# EAGLE board sensor-LCD-shield (EAGLE 5.06)
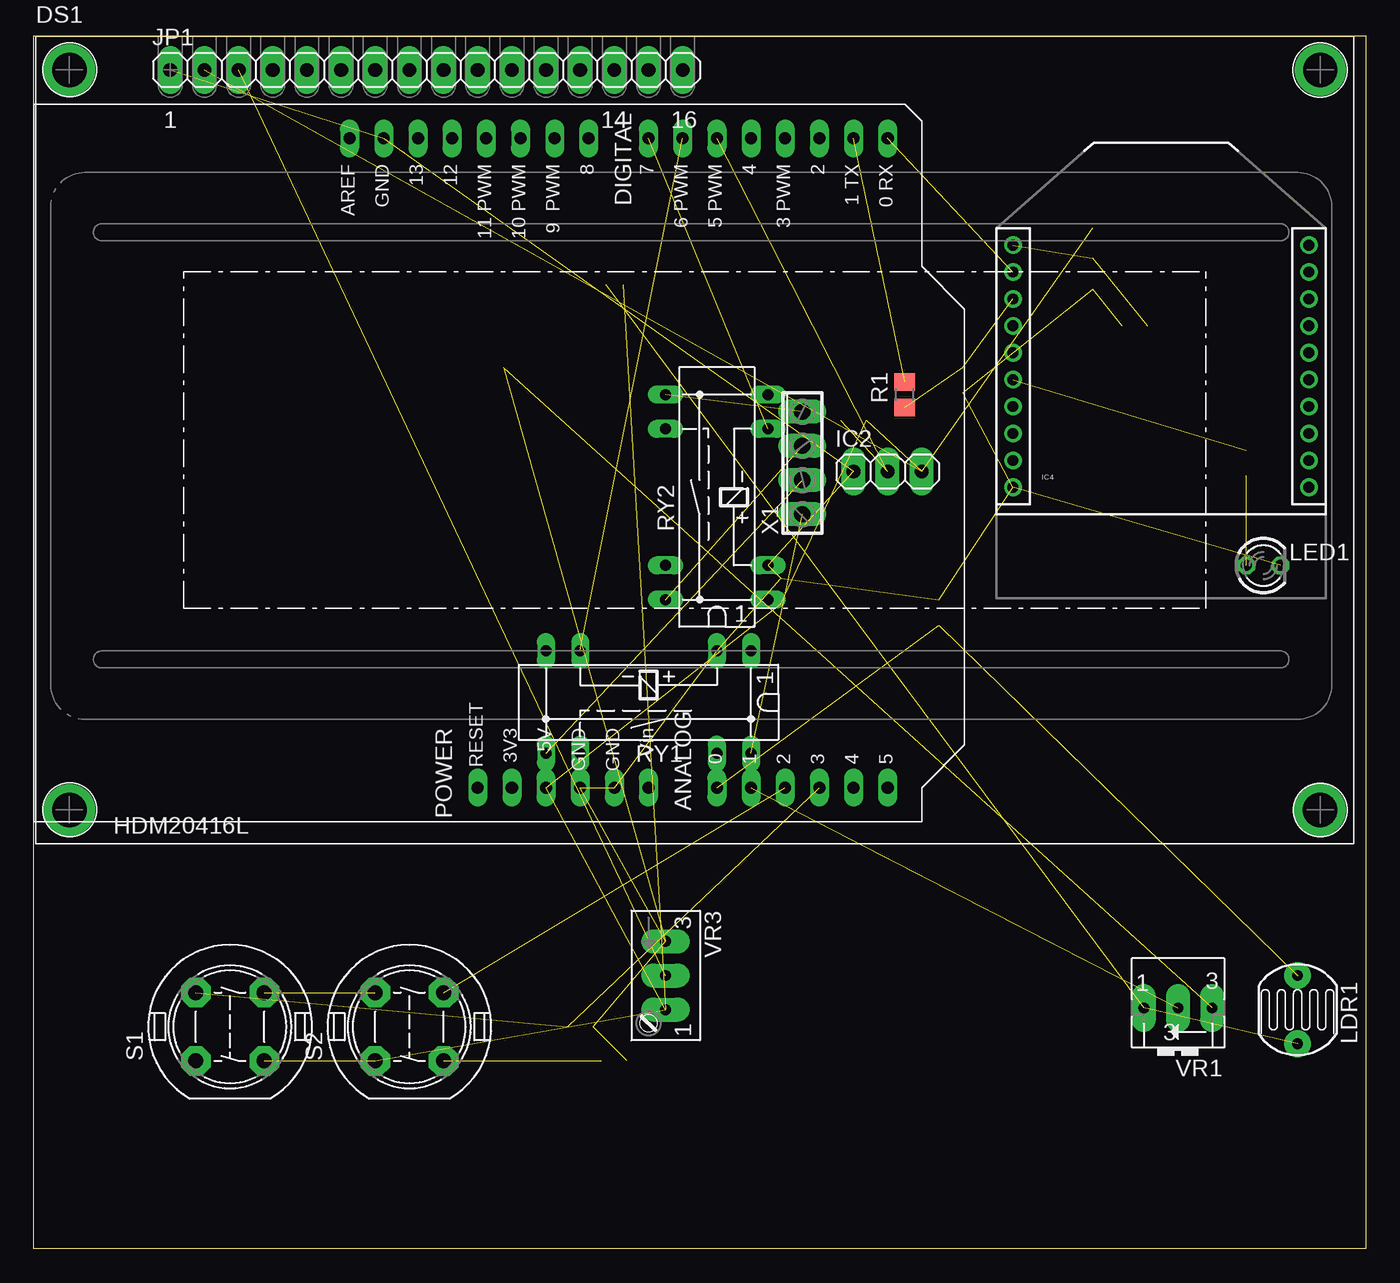
[diagram p0: board, top side]
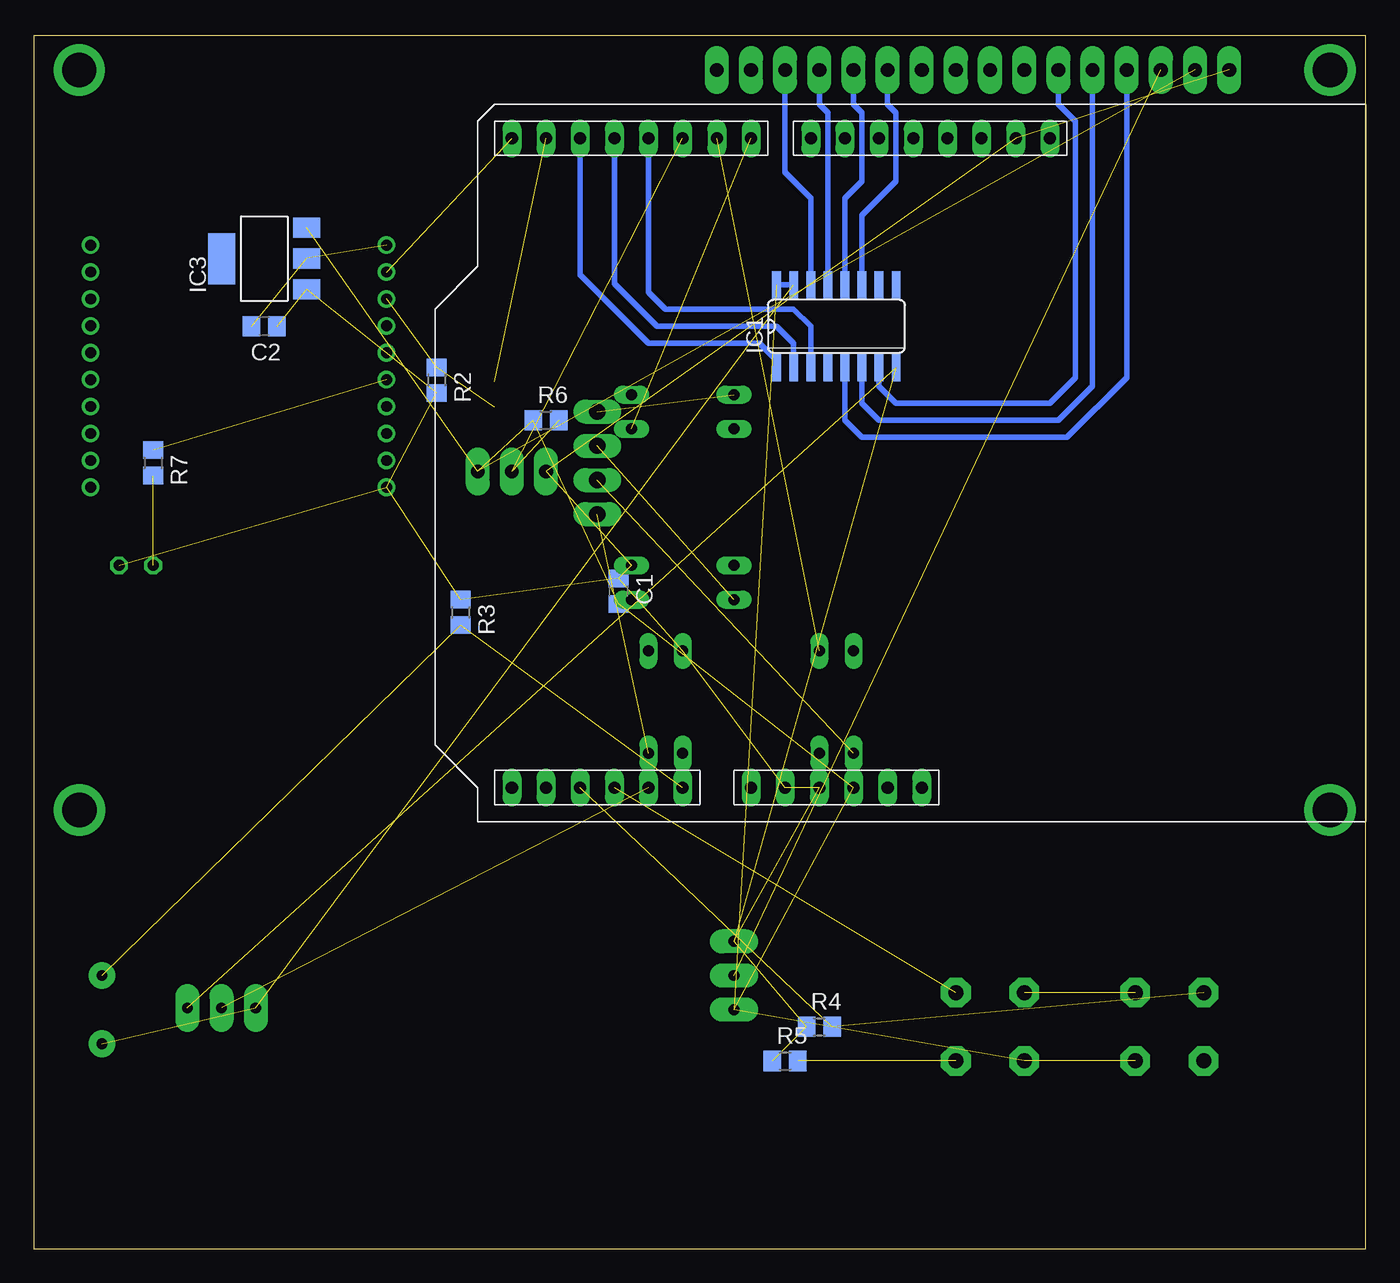
[diagram p1: board, bottom side, seen from below]

Size 99.06 x 90.17 mm. Coordinates in mm from the lower left corner, seen from the top.
Outline: 0,90.17 99.06,90.17 99.06,0 0,0 0,90.17
Copper layers (1*16): Top 0.035mm / dielectric 1.5mm / Bottom 0.035mm
Design rules "default": minimum track width 10mil, minimum drill 24mil, track to track 8mil, track to pad 8mil, pad to pad 8mil, via to via 8mil, smd to smd 8mil, copper to edge 40mil, drill to drill 8mil, minimum pad ring 10mil, minimum via ring 8mil, stop-mask expansion 4mil, vias tented up to drill 0mil, thermal gap 10mil

## Footprints (pad centres in the part's own frame; a part is rotated, then mirrored left to right if it is on the bottom)
C0805 = smd 1.3 x 1.5: 1 -0.95,0; 2 0.95,0
HDM20416L = drill 1.016 pad 1.778 long: 1 -38.105,27.947; 2 -35.565,27.947; 3 -33.025,27.947; 4 -30.485,27.947; 5 -27.945,27.947; 6 -25.405,27.947; 7 -22.865,27.947; 8 -20.325,27.947; 9 -17.785,27.947; 10 -15.245,27.947; 11 -12.705,27.947; 12 -10.165,27.947; 13 -7.625,27.947; 14 -5.085,27.947; 15 -2.545,27.947; 16 -0.005,27.947 | drill 2.54 pad 3.81 round: P$1 47.409,27.94; P$2 47.396,-27.064; P$3 -45.593,-27.064; P$4 -45.593,27.94
SO16 = smd 0.66 x 2.032: 1 -4.445,-3.073; 2 -3.175,-3.073; 3 -1.905,-3.073; 4 -0.635,-3.073; 5 0.635,-3.073; 6 1.905,-3.073; 7 3.175,-3.073; 8 4.445,-3.073; 9 4.445,3.073; 10 3.175,3.073; 11 1.905,3.073; 12 0.635,3.073; 13 -0.635,3.073; 14 -1.905,3.073; 15 -3.175,3.073; 16 -4.445,3.073
1X03 = drill 1.016 pad 1.8 long: 1 -2.54,0; 2 0,0; 3 2.54,0
SOT223 = smd 1.499 x 2.007: 1 -2.261,-3.15; 2 0.025,-3.15; 3 2.311,-3.15 | smd 3.81 x 2.007: 4 0,3.15
XBEE-SILK = drill 0.8 round: 1 -11,20; 2 -11,18; 3 -11,16; 4 -11,14; 5 -11,12; 6 -11,10; 7 -11,8; 8 -11,6; 9 -11,4; 10 -11,2; 11 11,2; 12 11,4; 13 11,6; 14 11,8; 15 11,10; 16 11,12; 17 11,14; 18 11,16; 19 11,18; 20 11,20
1X16 = drill 1.016 pad 1.8 long: 1 -19.05,0; 2 -16.51,0; 3 -13.97,0; 4 -11.43,0; 5 -8.89,0; 6 -6.35,0; 7 -3.81,0; 8 -1.27,0; 9 1.27,0; 10 3.81,0; 11 6.35,0; 12 8.89,0; 13 11.43,0; 14 13.97,0; 15 16.51,0; 16 19.05,0
VT800 = drill 0.8 pad 2 round: 1 -2.54,0; 2 2.54,0
LED3MM = drill 0.813 octagon: A -1.27,0; K 1.27,0
R0805 = smd 1.3 x 1.5: 1 -0.95,0; 2 0.95,0
RR1A = drill 0.813 long: 1 -7.62,-3.81; 2 -5.08,-3.81; 6 5.08,-3.81; 7 7.62,-3.81; 8 7.62,3.81; 9 5.08,3.81; 13 -5.08,3.81; 14 -7.62,3.81
DT6 = drill 1.118 pad 2.2 octagon: 1 -2.54,2.54; 2 2.54,2.54; 3 2.54,-2.54; 4 -2.54,-2.54
SHIELD = drill 0.9 pad 1.27 long: 0_RX -25.4,27.94; 1_TX -25.4,25.4; 2 -25.4,22.86; 3 -25.4,20.32; 3V3 22.86,0; 4 -25.4,17.78; 5 -25.4,15.24; 5V 22.86,2.54; 6 -25.4,12.7; 7 -25.4,10.16; 8 -25.4,5.715; 9 -25.4,3.175; 10 -25.4,0.635; 11 -25.4,-1.905; 12 -25.4,-4.445; 13 -25.4,-6.985; A_0 22.86,15.24; A_1 22.86,17.78; A_2 22.86,20.32; A_3 22.86,22.86; A_4 22.86,25.4; A_5 22.86,27.94; AREF -25.4,-12.065; GND0 -25.4,-9.525; GND1 22.86,7.62; GND2 22.86,5.08; RESET 22.86,-2.54; VIN 22.86,10.16
B25V = drill 0.8 pad 1.8 long: A 2.54,0.635; E -2.54,0.635; S 0,0.635
S64W = drill 0.8 pad 1.8 long: A 2.54,1.27; E -2.54,1.27; S 0,1.27
4POL254 = drill 1.2 long: 1 -3.81,0; 2 -1.27,0; 3 1.27,0; 4 3.81,0

## Placement (x,y rotation side)
C1  100 nF  [C0805]  55.56,48.89 270 bottom
C2  100 nF  [C0805]  81.92,68.58 180 bottom
DS1  HDM20416L  [HDM20416L]  48.26,59.69 0 top
IC1  4094D  [SO16]  39.37,68.58 0 bottom
IC2  [1X03]  63.5,57.78 0 top
IC3  REG1117  [SOT223]  81.92,73.6 90 bottom
IC4  XBEE-1B2  [XBEE-SILK]  83.82,54.61 0 top
JP1  [1X16]  29.21,87.63 0 top
LDR1  VT80N1  [VT800]  93.98,17.78 90 top
LED1  [LED3MM]  91.44,50.8 0 top
R1  100 k  [R0805]  64.77,63.5 90 top
R2  100 k  [R0805]  69.09,64.58 270 bottom
R3  100 k  [R0805]  67.31,47.31 270 bottom
R4  100 k  [R0805]  40.64,16.51 0 bottom
R5  100 k  [R0805]  43.18,13.97 0 bottom
R6  4k7  [R0805]  60.96,61.59 0 bottom
R7  69 R  [R0805]  90.17,58.42 270 bottom
RY1  RR1A  [RR1A]  45.72,40.64 180 top
RY2  RR1A  [RR1A]  50.8,55.88 90 top
S1  DT6  [DT6]  14.61,16.51 90 top
S2  DT6  [DT6]  27.94,16.51 90 top
U$1  ARDUINO-USBLONG_PADS_TEXT  [SHIELD]  35.56,57.15 270 top
VR1  [B25V]  85.09,18.54 180 top
VR3  100 k  [S64W]  45.72,20.32 270 top
X1  [4POL254]  57.15,58.42 90 top

## Library data of the parts
C1 C2 R1-R7 = rcl
DS1 = abi-lcd
IC1 = 40xx
IC2 JP1 = pinhead
IC3 = burr-brown
IC4 = SparkFun
LDR1 = photo-elements
LED1 = led
RY1 RY2 = relay
S1 S2 = switch-misc
U$1 = Arduino-Various
VR1 VR3 = pot
X1 = con-phoenix-254

## Nets
3V3: U$1.3V3
+3V3: C2.2 IC3.2 IC4.1
+5V: C1.2 IC1.15 IC1.16 IC2.3 IC3.3 JP1.2 LDR1.1 R6.1 S1.4 S2.1 U$1.5V VR1.A VR3.A
GND: C1.1 C2.1 IC1.8 IC2.1 IC3.1 IC4.10 JP1.1 LED1.K R2.2 R3.1 R4.1 R5.1 RY1.2 RY2.2 U$1.GND0 U$1.GND1 U$1.GND2 VR1.E VR3.E
N$1: IC1.1 U$1.2
N$2: IC1.3 U$1.4
N$3: IC1.2 U$1.3
N$4: RY1.6 U$1.6
N$5: RY2.6 U$1.7
N$6: RY1.14 X1.1
N$7: RY1.8 X1.2
N$9: RY2.8 X1.4
N$10: R4.2 S1.2 U$1.A_3
N$11: U$1.A_1 VR1.S
N$12: S2.3 U$1.A_2
N$13: LDR1.2 R3.2 U$1.A_0
N$14: IC1.11 JP1.11
N$15: IC1.12 JP1.12
N$16: IC1.13 JP1.13
N$17: IC1.14 JP1.14
N$18: IC1.5 JP1.4
N$19: IC1.6 JP1.5
N$20: IC1.7 JP1.6
N$22: IC2.2 R6.2 U$1.5
N$23: IC4.6 R7.1
N$24: LED1.A R7.2
N$25: R5.2 S2.4
N$26: IC4.3 R1.1 R2.1
N$27: S1.3 S2.2
N$30: RY2.14 X1.3
N$93: JP1.3 VR3.S
UART_RX: IC4.2 U$1.0_RX
UART_TX: R1.2 U$1.1_TX
VIN: U$1.VIN

## Tracks (layer width: path | path; a pad name or v marks a point on that pad's centre or on a via)
+3V3  (2 unrouted)
+5V  (11 unrouted)
  Bottom 0.406: IC1.15 IC1.16
GND  (18 unrouted)
N$1
  Bottom 0.406: IC1.1 43.81,66.04 45.09,67.31 53.34,67.31 58.42,72.39 U$1.2
N$2
  Bottom 0.406: IC1.3 41.27,68.58 42.55,69.85 52.07,69.85 53.34,71.12 U$1.4
N$3
  Bottom 0.406: IC1.2 42.55,67.31 43.81,68.58 52.7,68.58 55.88,71.75 U$1.3
N$4  (1 unrouted)
N$5  (1 unrouted)
N$6  (1 unrouted)
N$7  (1 unrouted)
N$9  (1 unrouted)
N$10  (2 unrouted)
N$11  (1 unrouted)
N$12  (1 unrouted)
N$13  (2 unrouted)
N$14
  Bottom 0.406: JP1.11 35.56,85.09 34.92,84.45 34.92,79.38 37.47,76.84 IC1.11
N$15
  Bottom 0.406: JP1.12 38.1,85.09 37.47,84.45 37.47,79.38 38.73,78.11 IC1.12
N$16
  Bottom 0.406: JP1.13 40.64,85.09 40.01,84.45 IC1.13
N$17
  Bottom 0.406: JP1.14 43.18,80.01 41.27,78.11 IC1.14
N$18
  Bottom 0.406: IC1.5 38.73,61.59 37.47,60.32 22.23,60.32 17.78,64.77 JP1.4
N$19
  Bottom 0.406: IC1.6 37.47,62.87 36.2,61.59 22.86,61.59 20.32,64.14 JP1.5
N$20
  Bottom 0.406: JP1.6 22.86,85.09 21.59,83.82 21.59,64.77 23.5,62.87 34.92,62.87 36.2,64.14 IC1.7
N$22  (2 unrouted)
N$23  (1 unrouted)
N$24  (1 unrouted)
N$25  (1 unrouted)
N$26  (2 unrouted)
N$27  (1 unrouted)
N$30  (1 unrouted)
N$93  (1 unrouted)
UART_RX  (1 unrouted)
UART_TX  (1 unrouted)